# Altium PCB PCB4.PcbDoc
Units mm, origin at the board's own origin, x right, y up, seen from the top; angles counter-clockwise.
Board outline 69 x 82 mm, 2 copper layers (Top Layer, Bottom Layer); 59 components, 64 nets, 251 pads, 48 vias.
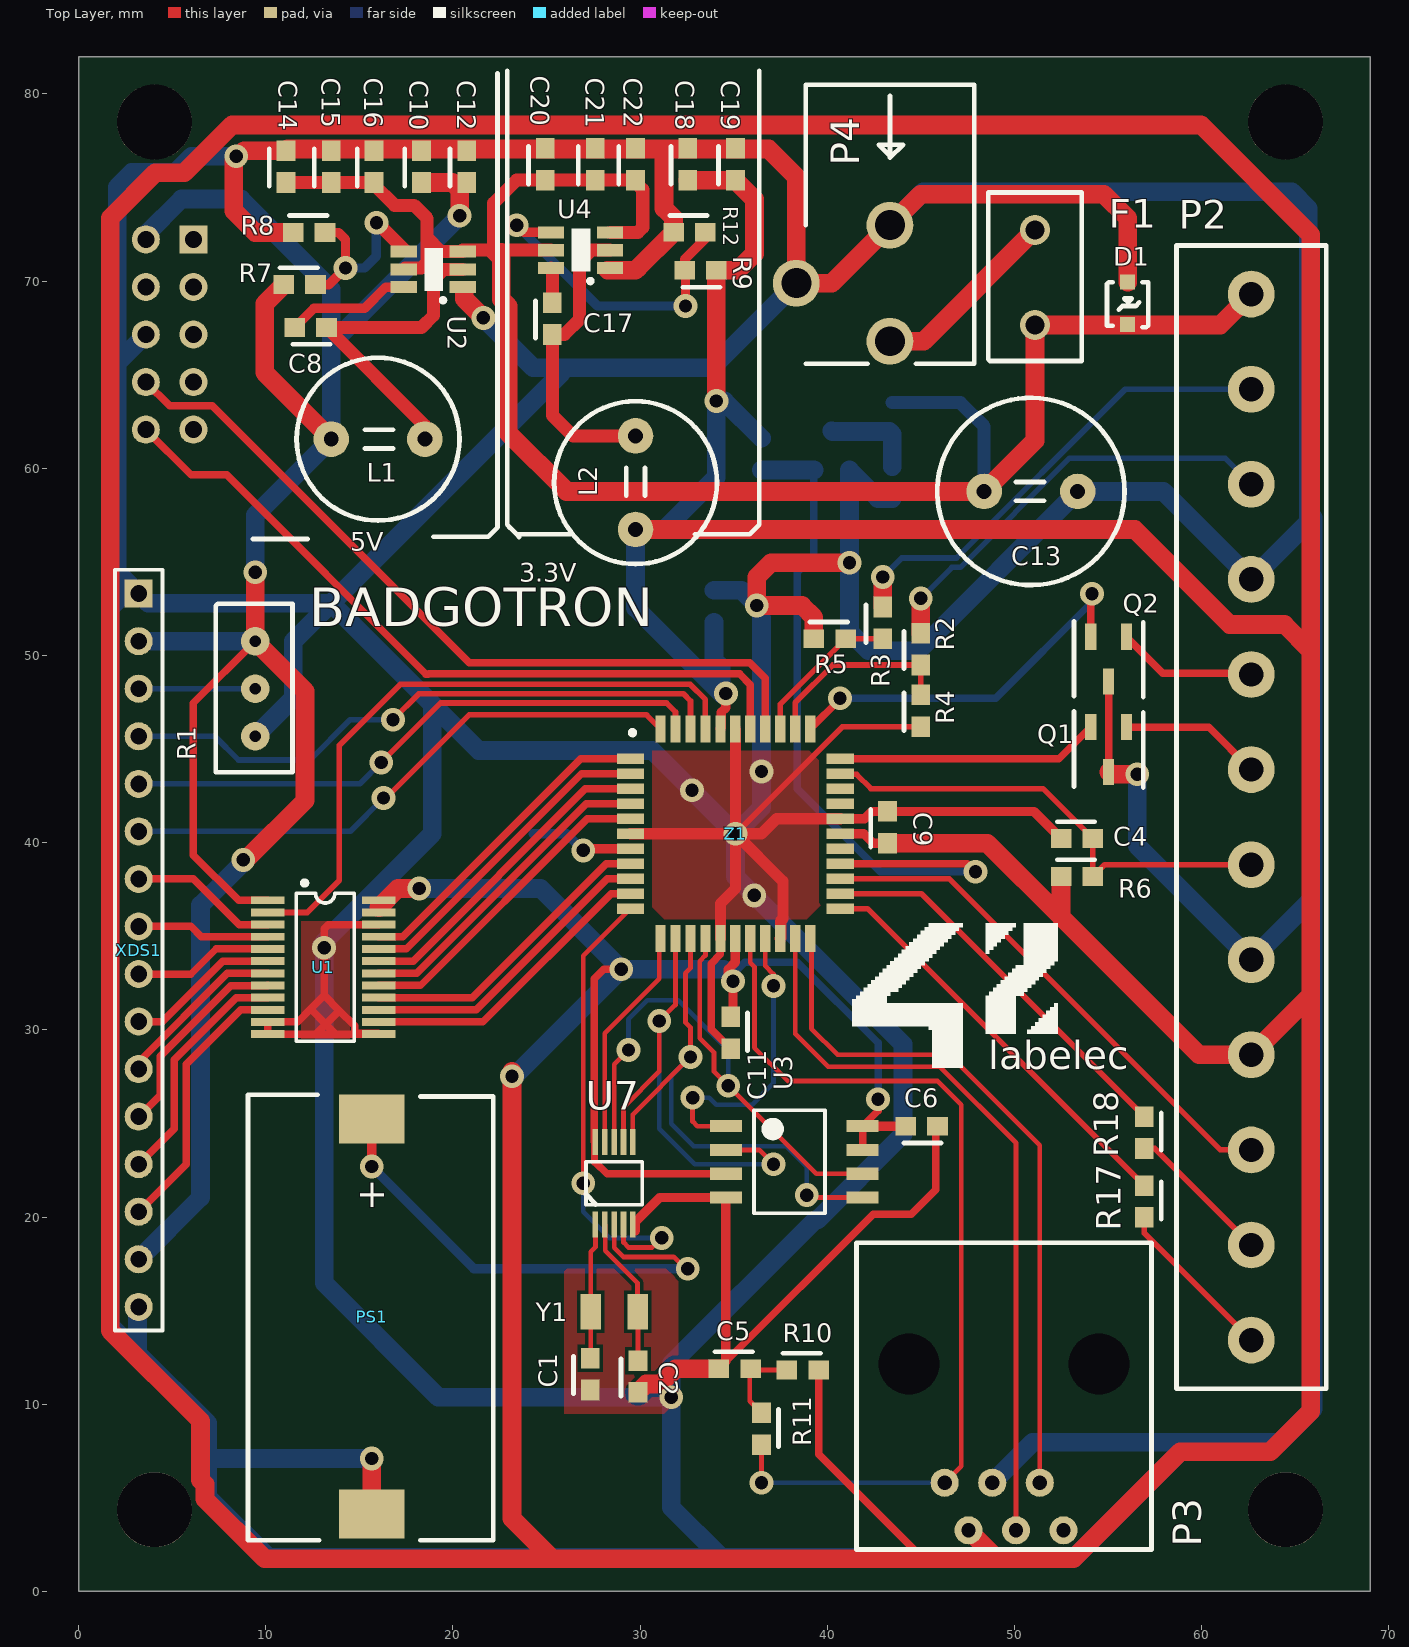
[diagram p0: Top Layer view]
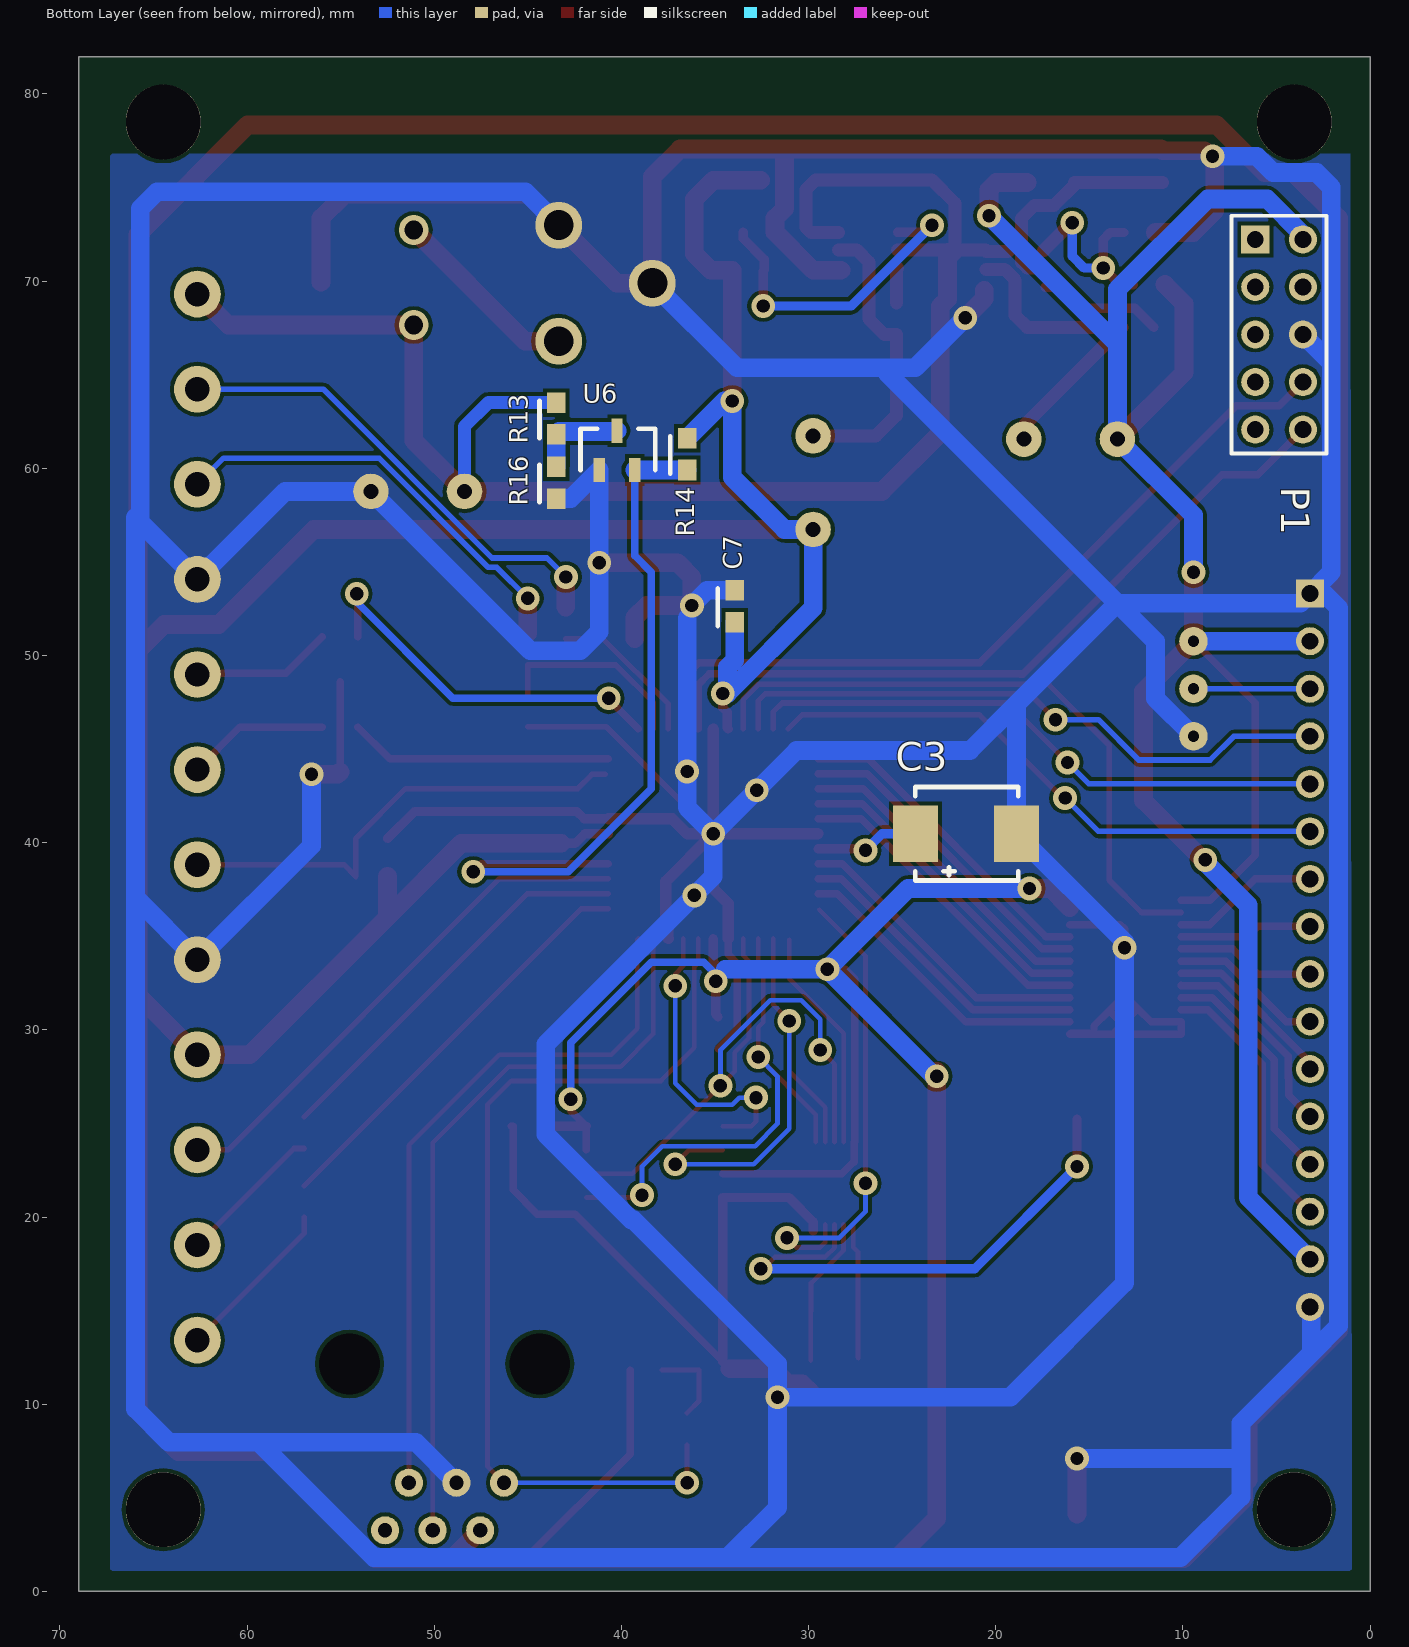
[diagram p1: Bottom Layer view, seen from below]

## Layer stack, top to bottom
Top Solder: solder mask 0.0102, Solder Resist, Dk 3.5
Top Layer: signal copper 0.0356
Dielectric 1: dielectric 0.32, FR-4, Dk 4.8
Bottom Layer: signal copper 0.0356
Bottom Solder: solder mask 0.0102, Solder Resist, Dk 3.5

## Board outline
0,0 69,0 69,82 0,82

## Design rules (kind name [scope] priority, off if disabled: settings)
Clearance [All] p1: gap=0.2
HoleSize [All] p1: absolutevalues=TRUE maxlimit=999 minlimit=0.3 maxpercent=80.000 minpercent=20.000
MinimumSolderMaskSliver [All] p1: minsoldermaskwidth=0.2
PolygonConnect [All] p1: connectstyle=Direct reliefconductorwidth=0.254 reliefentries=4 polygonreliefangle="90 Angle" airgapwidth=0.254
RoutingVias [All] p1: holewidth=0.711 width=1.27 viastyle="Through Hole" minholewidth=0.3 minwidth=0.7 maxholewidth=0.711 maxwidth=1.27
SilkToSilkClearance [All] p1: silktosilkclearance=0.1
SilkToSolderMaskClearance [IsPad] p1: minsilkscreentomaskgap=0.1 clearancetoexposedcopper=TRUE
SolderMaskExpansion [All] p1: expansion=0.102
UnpouredPolygon [All] p1: allowunpoured=FALSE
Width [All] p1: maxlimit=10 minlimit=0.254 preferedwidth=0.254
25 further rules are at their usual default settings.

## Classes and differential pairs
net class S_D[0..7]: S_D0 S_D1 S_D2 S_D3 S_D4 S_D5 S_D6 S_D7
net class RG_LED[0..1]: RG_LED0 RG_LED1
component class VRAIMENTHORSPCB: * B1 D4 DS1 MCL039PURGW P5
component class Power: 1 C8 C10 C12 C13 C14 C15 C16 C17 C18 C19 C20 C21 C22 D1 F1 L1 L2 P4 PS1 R7 R8 R9 R12 R13 R14 R16 U2 U4 U6
component class PIC: C1 C2 C3 C4 C5 C6 C7 C9 C11 P3 R6 R10 R11 U3 U7 Y1 Z1
component class OTHER: P1 P2 Q1 Q2 R2 R3 R4 R5 R17 R18
component class Ecran: R1 U1 XDS1

## Components (designator, comment, footprint, x,y, rotation, side; value= is the part's Value field where it differs from the comment)
C1 "18pF" 0603 27.344,10.761 r90 top
C2 "18pF" 0603 29.884,10.634 r90 top
C3 "10uF" C3 24.296,40.479 r180 bottom
C4 "100nF" 0603 52.49,40.225 r0 top
C5 "0.1uF" 0603 34.202,11.904 r0 top
C6 "22uF" 0603 45.886,24.858 r180 top
C7 "0.1uF" 0603 33.948,51.782 r90 bottom
C8 "0.1uF" 0603 13.247,67.53 r180 top
C9 "0.1uF" 0603 43.219,39.971 r90 top
C10 "22uF" 0603 18.325,75.269 r90 top
C11 "0.1uF" 0603 34.837,30.7 r270 top
C12 "22uF" 0603 20.738,75.269 r90 top
C13 "1000uF" Condo_trav 53.379,58.767 r180 top
C14 "10uF" 0603 11.086,75.269 r90 top
C15 "10uF" 0603 13.499,75.269 r90 top
C16 "0.1uF" 0603 15.785,75.269 r90 top
C17 "0.1uF" 0603 25.312,67.149 r90 top
C18 "22uF" 0603 32.553,75.396 r90 top
C19 "22uF" 0603 35.093,75.396 r90 top
C20 "10uF" 0603 24.933,75.396 r90 top
C21 "10uF" 0603 27.6,75.396 r90 top
C22 "0.1uF" 0603 29.757,75.396 r90 top
D1 "Diode 10TQ035" DiodeZin 56.046,69.943 r270 top
F1 "Fuse 1" FUSIBLE 51.093,72.737 r270 top
L1 "4.7uH" "Bobine Traversante 4.7" 13.501,61.561 r0 top
L2 "3.3uH" "Bobine Traversante 4.7" 29.757,56.735 r90 top
P1 "61304021121" HDR2X5 6.135,72.229 r270 bottom
P2 "31101112" Bornier12 62.65,13.428 r90 top
P3 "90512-001LF" RJ12 44.362,12.158 r0 top
P4 "FC681465P" JackAlim 43.346,72.991 r270 top
PS1 "Support Pile" Pile 15.66,25.239 r270 top
Q1 "MOSFET-N" nouveau_mosfetN 55.03,43.781 r180 top
Q2 "MOSFET-N" nouveau_mosfetN 55.03,48.607 r180 top
R1 "20k" POTARD 9.437,50.766 r270 top
R2 "300k" 0603 44.997,49.496 r90 top
R3 "300k" 0603 42.965,50.893 r90 top
R4 "100k" 0603 44.997,46.194 r90 top
R5 "100k" 0603 39.282,50.893 r0 top
R6 "330" 0603 52.49,38.193 r0 top
R7 "54.9K" 0603 10.961,69.816 r0 top
R8 "10K" 0603 11.467,72.602 r0 top
R9 "33.2K" 0603 34.075,70.578 r180 top
R10 "10K" 0603 37.836,11.826 r0 top
R11 "1Ko" 0603 36.488,9.54 r270 top
R12 "10K" 0603 31.789,72.61 r0 top
R13 "300k" 0603 43.473,61.815 r90 bottom
R14 "330" 0603 36.488,59.91 r90 bottom
R16 "100k" 0603 43.473,58.386 r90 bottom
R17 "60.4" 0603 56.935,21.683 r270 top
R18 "75" 0603 56.935,25.366 r270 top
U1 "74LVX4245MTCX" TRANS 16.041,36.923 r270 top
U2 "TPS562201DDCT" TPS562201DDCT 18.071,69.681 r90 top
U3 "SST25VF016B-50-4C-S2AF-T" FLASH 34.583,24.858 r0 top
U4 "TPS562201DDCT" TPS562201DDCT 25.947,70.705 r90 top
U6 "LM809M3-3.08/NOPB" LM809 41.187,59.91 r90 bottom
U7 "MCP79510-I/MS" rtc 28.614,21.81 r90 top
XDS1 "1-826629-6" HDR1X16 3.214,53.306 r270 top
Y1 "32.768kHz" QUARTZ32KHz 28.614,14.952 r0 top
Z1 "PIC32MX170F256D-I/PT" TQFP-44_L 35.091,40.479 r0 top

## Footprints (in the part's own frame and the unit in brackets; to place one, negate y for a bottom-side part, rotate by r counter-clockwise, add the part's x,y. Pads: shape width x height; smd on the part's side, far side on the other; paste and mask are expansions set on the pad)
0603 [mm] "Chip Inductor, Body 0.6x0.3mm, IPC High Density"
  rect 1.1x1 smd: 1(0,0) 2(1.7,0)
  silkscreen extent -0.2,0.9 1.8,0.9
"Bobine Traversante 4.7" [mm]
  round 1.9 hole 0.8: 1(0,0) 2(5,0)
  silkscreen extent -1.85,-4.35 6.85,4.35
Bornier12 [mm]
  round 2.5 hole 1.3: 1(0,0) 2(5.08,0) 3(10.16,0) 4(15.24,0) 5(20.32,0) 6(25.4,0) 7(30.48,0) 8(35.56,0) 9(40.64,0) 10(45.72,0) 11(50.8,0) 12(55.88,0)
  silkscreen extent -2.6,-4 58.48,4
C3 [mm]
  rect 2.4x3 smd: 1(0,0) 2(5.4,0)
  silkscreen extent 0,-2.5 5.5,2.5
Condo_trav [mm]
  round 1.9 hole 0.8: 1(0,0) 2(5,0)
  silkscreen extent -2.5,-5 7.5,5
DiodeZin [mm]
  rect 0.8x0.8 smd: 1(2.25,0) 3(0,0)
  silkscreen extent 0,-1.1 2.4,1.1
FLASH [mm] "8-Pin Plastic Medium Body Small Outline Package 1.27 mm Pitch, IPC Medium Density"
  rect 1.7x0.65 smd: 1(0,0) 2(0,-1.27) 3(0,-2.54) 4(0,-3.81) 5(7.3,-3.81) 6(7.3,-2.54) 7(7.3,-1.27) 8(7.3,0)
  silkscreen extent 1.5,-4.65 5.3,0.84
FUSIBLE [mm]
  round 1.6 hole 1: 1(0,0) 2(5.08,0)
  silkscreen extent -2,-2.5 7,2.5
HDR1X16 [mm] "Connector; Header; 16 Position"
  rect 1.5x1.5 hole 0.9: 1(0,0)
  round 1.5 hole 0.9: 2(2.54,0) 3(5.08,0) 4(7.62,0) 5(10.16,0) 6(12.7,0) 7(15.24,0) 8(17.78,0) 9(20.32,0) 10(22.86,0) 11(25.4,0) 12(27.94,0) 13(30.48,0) 14(33.02,0) 15(35.56,0) 16(38.1,0)
  silkscreen extent -1.27,-1.27 39.37,1.27
HDR2X5 [mm] "Connector; Header; 5x2 Position"
  rect 1.5x1.5 hole 0.9: 1(0,0)
  round 1.5 hole 0.9: 2(0,2.54) 3(2.54,0) 4(2.54,2.54) 5(5.08,0) 6(5.08,2.54) 7(7.62,0) 8(7.62,2.54) 9(10.16,0) 10(10.16,2.54)
  silkscreen extent -1.27,-1.27 11.43,3.81
JackAlim [mm]
  round 2.5 hole 1.6: 1(6.2,0) 2(3.1,-5) 3(0,0)
  silkscreen extent -7.5,-4.5 7.4,4.5
LM809 [mm]
  rect 1.3x0.6 smd: 1(0,0) 2(0,-1.9) 3(2.1,-0.95)
  silkscreen extent 0,-3 2.2,1
nouveau_mosfetN [mm]
  rect 0.6x1.4 smd: 1(-0.95,-2.4) 2(0.95,-2.4) 3(0,0)
  silkscreen extent -1.85,-3.23 1.85,0.83
Pile [mm]
  rect 2.6x3.5 smd: 1(0,0) 2(21.1,0)
  silkscreen extent -1.3,-6.6 22.5,6.5
POTARD [mil]
  round 60 hole 23.62: 1(0,0) 2(100,0) 3(200,0)
  silkscreen extent -79,-83 276,79
QUARTZ32KHz [mm]
  rect 1.1x1.9 smd: 1(-1.25,0) 2(1.25,0)
RJ12 [mm]
  round 1.524 hole 3.25 unplated: 0(0,0) 0(10.16,0)
  round 1.5 hole 0.762: 1(1.91,-6.35) 2(3.18,-8.89) 3(4.45,-6.35) 4(5.72,-8.89) 5(6.99,-6.35) 6(8.26,-8.89)
  silkscreen extent -2.8,-9.91 12.96,6.47
rtc [mm]
  rect 1.4x0.3 smd: 1(-2.2,1) 2(-2.2,0.5) 3(-2.2,0) 4(-2.2,-0.5) 5(-2.2,-1) 6(2.2,-1) 7(2.2,-0.5) 8(2.2,0) 9(2.2,0.5) 10(2.2,1)
  silkscreen extent -1.15,-1.5 1.15,1.5
TPS562201DDCT [mm]
  rect 0.65x1.4 smd: 1(0,-2.45) 2(0.95,-2.45) 3(1.9,-2.45) 4(1.9,0.7) 5(0.95,0.7) 6(0,0.7)
  silkscreen extent -0.8,-1.5 2.1,-0.4
TQFP-44_L [mm] "44-Pin Thin Quad Flat Pack 0.8 mm Pitch, 1.0/0.1 mm Lead Form, IPC High Density"
  rect 1.45x0.55 smd: 1(-5.6,4) 2(-5.6,3.2) 3(-5.6,2.4) 4(-5.6,1.6) 5(-5.6,0.8) 6(-5.6,0) 7(-5.6,-0.8) 8(-5.6,-1.6) 9(-5.6,-2.4) 10(-5.6,-3.2) 11(-5.6,-4) 23(5.6,-4) 24(5.6,-3.2) 25(5.6,-2.4) 26(5.6,-1.6) 27(5.6,-0.8) 28(5.6,0) 29(5.6,0.8) 30(5.6,1.6) 31(5.6,2.4) 32(5.6,3.2) 33(5.6,4)
  rect 0.55x1.45 smd: 12(-4,-5.6) 13(-3.2,-5.6) 14(-2.4,-5.6) 15(-1.6,-5.6) 16(-0.8,-5.6) 17(0,-5.6) 18(0.8,-5.6) 19(1.6,-5.6) 20(2.4,-5.6) 21(3.2,-5.6) 22(4,-5.6) 34(4,5.6) 35(3.2,5.6) 36(2.4,5.6) 37(1.6,5.6) 38(0.8,5.6) 39(0,5.6) 40(-0.8,5.6) 41(-1.6,5.6) 42(-2.4,5.6) 43(-3.2,5.6) 44(-4,5.6)
  silkscreen extent -5.62,5.28 -5.37,5.52
TRANS [mm] "Shrink Small Outline; 24 Leads; Body Width 4.4 mm; Pitch 0.65 mm"
  rect 0.42x1.78 smd: 1(0,-5.94) 2(0.65,-5.94) 3(1.3,-5.94) 4(1.95,-5.94) 5(2.6,-5.94) 6(3.25,-5.94) 7(3.9,-5.94) 8(4.55,-5.94) 9(5.2,-5.94) 10(5.85,-5.94) 11(6.5,-5.94) 12(7.15,-5.94) 13(7.15,0) 14(6.5,0) 15(5.85,0) 16(5.2,0) 17(4.55,0) 18(3.9,0) 19(3.25,0) 20(2.6,0) 21(1.95,0) 22(1.3,0) 23(0.65,0) 24(0,0)
  silkscreen extent -1.05,-4.42 7.53,-1.31

## Part data
C1 C2 C4 C5 C7 C9 C11 C13: library part Cap, "Capacitor"
C3: library part "Cap Pol1"
C6: library part Cap, "Cout_Reg_3.3v"
C8 C10 C12 C14 C15 C16 C17 C18 C19 C20 C21 C22: library part Cap, "Reg_5v"
D1: "Diode Zenner"
F1: "Fuse"
L1: library part Inductor, "L_Reg_5v"
L2: library part Inductor, "L_Reg_3v"
P1: library part "Header 5X2", "Header, 5-Pin, Dual row"
P2: library part "Header 12", "Header, 12-Pin"
P3: library part "Header 6", "PortRJ12_debug"
P4: library part FC68148S, "Power connector"
PS1: library part SMTU-1225-1-LF
Q1 Q2: "N-Channel MOSFET"
R1: library part RPot, "Potentiometer"
R2 R3 R4 R5 R6 R7 R8 R9 R10 R11 R12 R13 R14 R16 R17 R18: library part Res2, "Resistor"
U1: "Bus Transceiver"
U2 U4: "Reg 12V-5V"
U3: library part Memoire, "FLASH"
U6: "Voltage Monitor"
U7: library part MCP79510, "RTC"
XDS1: library part "Header 16", "Header, 16-Pin"
Y1: library part XTAL, "Crystal Oscillator"
Z1: library part PIC32_1, "PIC"

## Free pads (board coordinates)
  round 4 hole 4: 3(4.055,4.363) 3(4.055,78.5) 3(64.476,4.363) 3(64.476,78.5)

## Via types
v1: diameter 1.27, hole 0.711, Top Layer to Bottom Layer, 48 vias

## Nets (pads, with @x,y where several pads share a name; then routed paths per layer and width w, separated by ;. In a path a pad name is that pad's centre, name@x,y a point inside that pad or via, vN(x,y) a via of type N, cw(c..) or ccw(c..) an arc to the next point about the centre after c; other vN are vias at no path point)
5VDC: C10.1 C12.1 L1.1 P1.2 R1.1 R7.1 U1.1 XDS1.2 XDS1.15 | length 118.7
  Top Layer w0.4: R1.1 6.135,47.464 6.135,39.336 8.548,36.923 U1.1
  Top Layer w1: v1(8.802,39.082) 8.929,39.082 12.104,42.257 12.104,48.099 R1.1 v1(9.437,54.449) ; R7.1 9.945,68.8 9.945,65.117 L1.1 ; C10.1 19.98,75.269 20.359,74.89 v1(20.359,73.499)
  Bottom Layer w1: XDS1.15 6.516,21.048 6.516,36.669 8.802,38.955 v1(8.802,39.082) ; XDS1.2 R1.1 ; P1.2 3.595,72.483 5.5,74.388 8.675,74.388 13.501,69.562 13.501,66.641 ; v1(9.437,54.449) 9.437,57.497 L1.1 13.501,66.641 ; v1(20.359,73.499) 13.501,66.641
12VDC: C13.2 C14.1 C15.1 C16.1 C20.1 C21.1 C22.1 D1.1 F1.2 P2.12 R13.2 U2.3 U2.5 U4.3 U4.5 | length 102.3
  Top Layer w0.7: C14.1 C15.1 C16.1 15.785,75.152 16.888,74.049 17.929,74.049 18.623,73.355 18.623,72.314 ; U2.5@17.446,70.706 18.325,70.706 18.621,71.002 18.621,72.312 18.623,72.314 ; U2.3 19.356,71.581 18.623,72.314 ; U2.3@20.521,71.656 22.178,71.656 22.178,74.175 23.399,75.396 C20.1 C21.1 29.638,75.396 30.14,74.894 30.14,72.866 29.879,72.605 U4.3 ; 22.179,71.655 U4.5
  Top Layer w1: 22.178,71.656 22.179,71.655 22.579,71.255 ; 22.579,71.528 22.579,71.255 ; P2.12 60.999,67.657 F1.2 51.093,61.481 C13.2 26.074,58.767 22.964,61.877 22.964,68.656 22.579,69.041 22.579,71.255
  Bottom Layer w0.7: R13.2 47.107,63.515 48.379,62.243 C13.2
CMD_SERVO: P2.3 Z1.25 | length 28
  Top Layer w0.3: Z1.25 46.508,38.079 60.999,23.588 P2.3
CR_DATA0_3V: R2.1 R4.2 Z1.35 | length 10.5
  Top Layer w0.3: Z1.35 38.291,47.489 40.298,49.496 R2.1 R4.2
CR_DATA0_12V: P2.10 R2.2 | length 23.2
  Top Layer w1: R2.2 v1(44.997,53.052)
  Bottom Layer w0.3: v1(44.997,53.052) 46.656,54.711 47.109,54.711 52.943,60.545 61.253,60.545 P2.10
CR_DATA1_3V: R3.1 R5.2 Z1.36 | length 8.2
  Top Layer w0.3: Z1.36 37.491,47.402 R5.2 R3.1
CR_DATA1_12V: P2.11 R3.2 | length 25.4
  Top Layer w1: R3.2 v1(42.965,54.195)
  Bottom Layer w0.3: v1(42.965,54.195) 43.981,55.211 46.902,55.211 55.919,64.228 P2.11
CR_LED_G: Q2.2 Z1.34 | length 20.4
  Top Layer w0.4: Z1.34 40.679,47.667 v1(40.679,47.718) ; v1@54.014,53.052 54.08,52.986 54.08,52.798 Q2.2
  Bottom Layer w0.4: v1(40.679,47.718) 49,47.718 54.141,52.859 v1(54.141,53.306)
CR_LED_G_CTRL: P2.8 Q2.1 | length 7.5
  Top Layer w0.4: Q2.1 57.933,49.054 P2.8@62.584,49.054
  Top Layer w1: P2.8@62.584,49.054 P2.8
CR_LED_R: Q1.2 Z1.33 | length 14.1
  Top Layer w0.4: Z1.33 52.378,44.479 Q1.2
CR_LED_R_CTRL: P2.7 Q1.1 | length 7.6
  Top Layer w0.4: Q1.1 60.377,46.181 P2.7
FLSH_CE: U3.1 Z1.19 | length 16
  Top Layer w0.254: v1(32.805,26.382) 32.805,25.112 33.059,24.858 U3.1 ; Z1.19 36.691,33.418 37.123,32.986 v1(37.123,32.351)
  Bottom Layer w0.254: v1(32.805,26.382) 33.694,26.382 34.075,26.001 35.98,26.001 37.123,27.144 v1(37.123,32.351)
GND: C1.1 C2.1 C3.2 C4.1 C5.1 C6.1 C7.2 C9.2 C10.2 C11.2 C12.2 C13.1 C14.2 C15.2 C16.2 C18.2 C19.2 C20.2 C21.2 C22.2 D1.3 P1.6 P2.5 P2.9 P3.3 P4.2 P4.3 PS1.2 Q1.3 Q2.3 R1.3 R4.1 R5.1 R8.1 R12.1 R16.1 U1.11 U1.12 U1.13 U1.22 U2.1 U3.4 U4.1 U6.1 U7.5 XDS1.1 XDS1.16 Z1.6 Z1.16 Z1.20 Z1.29 Z1.39 | length 740
  Top Layer w0.3: v1(35.091,40.479) 40.806,46.194 R4.1
  Top Layer w0.4: U1.22 13.344,35.623 13.12,35.399 v1(13.12,34.383) 13.12,31.843 ; C5.1 34.583,12.285 42.457,20.159 44.489,20.159 45.787,21.457 45.787,24.858 C6.1 ; Z1.16 34.291,34.031 33.802,33.542 33.802,30.035 C11.2 ; Q1.3 Q2.3 ; 12.41,31.133 13.12,31.843 ; 12.41,31.133 11.7,30.423 U1.11 U1.12 12.681,29.773 ; 12.41,31.133 12.41,31.118 13.218,30.31 ; 12.681,29.773 13.218,30.31 ; 12.681,29.773 13.755,29.773 ; 13.12,31.843 13.936,31.028 ; 13.218,30.31 13.936,31.028 ; 13.218,30.31 13.755,29.773 ; 13.755,29.773 U1.13 16.001,29.813 14.751,29.813 14.751,30.212 13.936,31.028
  Top Layer w0.5: U7.5@29.757,19.27 29.757,19.753 31.052,21.048 U3.4 C5.1@34.583,12.285 ; Z1.29 41.987,41.279 42.379,41.671 C9.2 51.044,41.671 C4.1
  Top Layer w0.6: Z1.6 v1(35.091,40.479) ; Z1.16 34.291,36.758 35.091,37.558 v1(35.091,40.479) ; Z1.39 v1(35.091,40.479) ; Z1.20 37.516,34.904 37.516,35.811 37.631,35.926 37.631,37.939 v1(35.091,40.479) ; Z1.29 37.288,41.279 36.488,40.479 v1(35.091,40.479)
  Top Layer w1: v1@8.294,76.42 8.294,73.753 9.445,72.602 R8.1 ; v1@8.843,76.969 C14.2 ; C14.2@11.172,77.055 31.281,77.055 ; PS1.2 v1(15.66,7.1) ; U2.1@20.613,69.514 20.613,69.054 v1(21.629,68.038) ; U4.1@28.27,70.578 29.757,70.578 ; C2.1 30.334,11.084 31.084,11.084 31.904,11.904 C5.1 ; 29.884,70.705 R12.1 31.789,73.372 31.281,73.88 31.281,77.055 ; R5.1 39.282,52.036 38.647,52.671 v1(36.234,52.671) 36.234,54.195 36.996,54.957 v1(41.187,54.957) ; Q1.3 55.157,43.654 v1(56.554,43.654) ; D1.3 56.046,73.372 54.776,74.642 44.997,74.642 P4.3 40.246,69.891 P4.2 38.346,75.578 36.869,77.055 31.281,77.055
  Bottom Layer w0.3: U6.1 U6.1@41.187,60.164
  Bottom Layer w1: XDS1.16 3.151,15.143 3.151,12.73 ; P1.6 2.071,65.625 ; v1(8.421,76.674) 6.047,76.674 5.173,75.8 2.848,75.8 2.071,75.023 2.071,65.625 ; R1.3 11.469,47.718 11.469,50.766 13.501,52.798 ; v1(15.66,7.1) 6.983,7.1 6.897,7.015 ; v1(21.629,68.038) 24.296,65.371 33.826,65.371 P4.2 ; 25.82,65.117 13.501,52.798 ; C7.2 35.423,53.482 v1(36.234,52.671) ; 36.488,52.007 36.488,41.876 v1(35.091,40.479) ; P4.3 45.124,74.769 64.809,74.769 65.698,73.88 65.698,57.116 ; R16.1 42.711,58.386 U6.1 v1(41.187,54.957) 41.187,51.274 42.203,50.258 44.87,50.258 C13.1 57.951,58.767 P2.9 65.698,57.116 ; P3.3 50.971,7.967 59.372,7.967 ; v1(56.554,43.654) 56.554,39.844 P2.5 65.952,37.05 ; 2.071,65.625 2.071,54.449 XDS1.1 ; 3.151,12.73 6.897,8.983 6.897,7.015 ; 3.151,12.73 1.69,14.19 1.69,52.544 2.452,53.306 XDS1.1 ; XDS1.1 3.722,52.798 13.501,52.798 ; 6.897,7.015 6.897,5.046 10.125,1.818 34.329,1.818 ; 13.501,52.798 18.896,47.403 ; 18.896,47.403 21.375,44.924 30.646,44.924 v1(35.091,40.479) ; 18.896,47.403 C3.2 13.12,34.703 v1(13.12,34.383) 13.12,16.476 19.216,10.38 v1(31.662,10.38) ; v1(31.662,10.38) 31.662,12.158 39.344,19.84 39.454,19.84 44.046,24.432 44.046,29.241 35.091,38.196 v1(35.091,40.479) ; v1(31.662,10.38) 31.662,4.485 34.329,1.818 ; 34.329,1.818 53.223,1.818 59.372,7.967 ; 59.372,7.967 64.174,7.967 65.952,9.745 65.952,37.05 ; 65.698,57.116 65.952,57.37 65.952,37.05
  other v1: 36.1,37.187 32.77,42.8 36.488,43.8
MCLR: P3.1 R11.2 Z1.18 | length 50.6
  Top Layer w0.254: Z1.18 35.891,33.583 36.107,33.367 36.107,29.049 37.885,27.271 45.886,27.271 47.156,26.001 47.156,6.692 P3.1 ; v1(36.488,5.808) R11.2
  Bottom Layer w0.254: v1(36.488,5.808) P3.1
NetC3_1: C3.1 Z1.7 | length 5.5
  Top Layer w0.5: v1@27.052,39.679 Z1.7
  Bottom Layer w0.5: C3.1 26.074,40.479 v1(26.963,39.59)
NetC5_2: C5.2 R10.1 R11.1 | length 4.5
  Top Layer w0.254: R11.1 35.853,10.175 35.853,11.826 R10.1
NetC8_1: C8.1 L1.2 U2.2 | length 17.8
  Top Layer w0.5: L1.2 L1.2@18.501,62.276
  Top Layer w0.7: L1.2@18.501,62.276 C8.1 18.327,67.53 18.962,68.165 18.962,70.07 19.523,70.631 U2.2
NetC8_2: C8.2 U2.6 | length 6.7
  Top Layer w0.5: C8.2 12.563,68.546 15.279,68.546 16.414,69.681 U2.6
NetC17_1: C17.1 L2.2 U4.2 | length 16
  Top Layer w0.7: U4.2 27.405,71.655 26.77,71.02 26.77,67.972 25.947,67.149 C17.1 25.312,62.831 26.408,61.735 L2.2
NetC17_2: C17.2 U4.6 | length 1.9
  Top Layer w0.7: U4.6 25.312,70.64 C17.2
NetF1_1: F1.1 P4.1 | length 10.2
  Top Layer w1: P4.1 45.147,66.791 F1.1
NetP2_1: P2.1 R17.2 | length 8.9
  Top Layer w0.3: R17.2 56.935,19.143 P2.1
NetP2_2: P2.2 R18.2 | length 7.9
  Top Layer w0.3: R18.2 57.492,23.666 P2.2
NetR7_2: R7.2 R8.2 U2.4 | length 10.6
  Top Layer w0.5: R7.2 13.374,69.816 v1(14.263,70.705) 14.263,72.229 13.89,72.602 R8.2
  Top Layer w0.7: v1(15.914,73.118) 15.968,73.118 U2.4@17.438,71.648
  Bottom Layer w0.5: v1(14.263,70.705) 15.279,70.705 15.914,71.34 v1(15.914,73.118)
NetR9_2: R9.2 R12.2 U4.4 | length 17.2
  Top Layer w0.5: v1(23.407,72.991) 23.793,72.605 U4.4 ; v1(32.424,68.673) 32.424,70.529 R9.2 32.375,71.164 33.489,72.278 R12.2
  Bottom Layer w0.5: v1(23.407,72.991) 27.725,68.673 v1(32.424,68.673)
PGEC1: P3.5 Z1.22 | length 37.6
  Top Layer w0.254: Z1.22 39.155,34.815 39.155,30.065 40.552,28.668 46.521,28.668 51.352,23.837 P3.5
PGED1: P3.4 Z1.21 | length 40
  Top Layer w0.254: Z1.21 38.291,29.786 40.044,28.033 46.013,28.033 50.082,23.964 P3.4
PIC_RASPI_RXD: P1.8 Z1.37 | length 42.4
  Top Layer w0.4: P1.8 4.865,63.339 7.151,63.339 20.867,49.623 35.853,49.623 36.691,48.785 Z1.37
PIC_RASPI_TXD: P1.10 Z1.38 | length 40.3
  Top Layer w0.4: P1.10 6.008,59.656 7.913,59.656 18.562,49.007 18.694,49.007 18.701,49.014 35.319,49.014 35.891,48.442 Z1.38
POT_CONTRASTE: R1.2 XDS1.3 | length 6.2
  Bottom Layer w0.3: XDS1.3 R1.2
POWEROK: R14.1 U6.2 Z1.26 | length 39
  Top Layer w0.4: Z1.26 47.486,38.879 v1(47.918,38.447)
  Bottom Layer w0.4: U6.2 39.287,55.343 38.393,54.449 38.393,42.892 42.838,38.447 v1(47.918,38.447)
  Bottom Layer w1: R14.1 U6.2
RG_LED0: R17.1 Z1.23 | length 22.4
  Top Layer w0.3: Z1.23 42.139,36.479 R17.1
RG_LED1: R18.1 Z1.24 | length 21.2
  Top Layer w0.3: Z1.24 45.022,37.279 R18.1
RTC_CS: U7.4 Z1.11 | length 25.2
  Top Layer w0.254: v1(26.963,21.81) 26.963,33.951 Z1.11@29.427,36.415 ; U7.4 29.114,18.643 29.376,18.381 30.646,18.381 v1(31.154,18.889)
  Bottom Layer w0.254: v1(26.963,21.81) 26.963,20.286 28.36,18.889 v1(31.154,18.889)
RTC_MFP: U7.9 Z1.12 | length 12
  Top Layer w0.254: U7.9 28.114,29.819 31.027,32.732 Z1.12@31.027,34.815
S_D0: U1.21 Z1.1 | length 17.4
  Top Layer w0.4: U1.21 17.316,34.973 26.822,44.479 Z1.1
S_D1: U1.20 Z1.2 | length 17.3
  Top Layer w0.4: U1.20 17.515,34.323 26.871,43.679 Z1.2
S_D2: U1.19 Z1.3 | length 17.3
  Top Layer w0.4: U1.19 17.871,33.673 27.077,42.879 Z1.3
S_D3: U1.18 Z1.4 | length 17.2
  Top Layer w0.4: U1.18 18.07,33.023 27.126,42.079 Z1.4
S_D4: U1.17 Z1.5 | length 17.1
  Top Layer w0.4: U1.17 18.268,32.373 27.174,41.279 Z1.5
S_D5: U1.16 Z1.8 | length 16.4
  Top Layer w0.4: U1.16 21.041,31.723 28.197,38.879 Z1.8
S_D6: U1.15 Z1.9 | length 16.4
  Top Layer w0.4: U1.15 21.24,31.073 28.246,38.079 Z1.9
S_D7: U1.14 Z1.10 | length 16.3
  Top Layer w0.4: U1.14 21.606,30.423 28.462,37.279 Z1.10
S_E: XDS1.6 Z1.44 | length 30.8
  Top Layer w0.3: v1(16.295,42.384) 16.422,42.384 20.867,46.829 30.341,46.829 Z1.44
  Bottom Layer w0.3: XDS1.6 14.517,40.606 v1(16.295,42.384)
S_RS: XDS1.4 Z1.42 | length 33.1
  Top Layer w0.3: v1(16.803,46.575) 18.185,47.957 19.129,47.957 19.136,47.964 32.305,47.964 32.691,47.578 Z1.42
  Bottom Layer w0.3: XDS1.4 7.278,45.686 8.548,44.416 12.358,44.416 14.517,46.575 v1(16.803,46.575)
S_RW: XDS1.5 Z1.43 | length 31.6
  Top Layer w0.3: v1(16.168,44.289) 19.343,47.464 31.408,47.464 31.891,46.981 Z1.43
  Bottom Layer w0.3: XDS1.5 15.025,43.146 v1(16.168,44.289)
SPI_SCK: U3.6 U7.8 Z1.15 | length 33.4
  Top Layer w0.254: U7.8 28.614,28.16 v1(29.376,28.922) ; Z1.15 33.491,33.976 33.186,33.671 33.186,29.557 33.948,28.795 33.948,27.779 v1(34.71,27.017) 39.409,22.318 U3.6
  Bottom Layer w0.254: v1(29.376,28.922) 29.376,30.573 30.392,31.589 32.043,31.589 34.71,28.922 v1(34.71,27.017)
SPI_SI: U3.2 U7.7 Z1.13 | length 27.5
  Top Layer w0.254: U7.7 29.114,25.866 31.027,27.779 v1(31.027,30.471) 31.891,31.335 Z1.13 ; U3.2 36.361,23.588 v1(37.123,22.826)
  Bottom Layer w0.254: v1(31.027,30.471) 31.027,24.731 32.932,22.826 v1(37.123,22.826)
SPI_SO: U3.5 U7.6 Z1.14 | length 29.1
  Top Layer w0.254: U7.6 29.614,25.477 v1(32.691,28.554) 32.691,30.135 32.424,30.402 32.424,33.031 32.691,33.298 Z1.14 ; v1(38.901,21.175) 39.028,21.048 U3.5
  Bottom Layer w0.254: v1(32.691,28.554) 31.662,27.525 31.662,24.985 32.859,23.788 37.812,23.788 38.901,22.699 v1(38.901,21.175)
STATUS_BTN: C4.2 P2.6 R6.2 Z1.32 | length 25.5
  Top Layer w0.3: Z1.32@40.873,43.654 41.568,43.654 42.33,42.892 51.523,42.892 C4.2 R6.2 54.825,38.828 P2.6
TS_D0: U1.3 XDS1.7 | length 7.9
  Top Layer w0.4: XDS1.7 6.135,38.066 8.578,35.623 U1.3
TS_D1: U1.4 XDS1.8 | length 7.1
  Top Layer w0.4: XDS1.8 6.008,35.526 6.561,34.973 U1.4
TS_D2: U1.5 XDS1.9 | length 7.4
  Top Layer w0.4: XDS1.9 6.008,32.986 7.345,34.323 U1.5
TS_D3: U1.6 XDS1.10 | length 8.2
  Top Layer w0.4: XDS1.10 4.484,30.446 7.711,33.673 U1.6
TS_D4: U1.7 XDS1.11 | length 9.2
  Top Layer w0.4: XDS1.11 3.214,28.287 7.95,33.023 U1.7
TS_D5: U1.8 XDS1.12 | length 11
  Top Layer w0.4: XDS1.12 4.357,26.509 4.357,27.416 4.364,27.423 4.364,28.588 8.127,32.351 10.079,32.351 U1.8
TS_D6: U1.9 XDS1.13 | length 12.7
  Top Layer w0.4: XDS1.13 5.119,24.731 5.119,28.414 8.428,31.723 U1.9
TS_D7: U1.10 XDS1.14 | length 14.5
  Top Layer w0.4: XDS1.14 5.754,22.826 5.754,28.16 8.667,31.073 U1.10
TS_TR: U1.2 Z1.41 | length 34.6
  Top Layer w0.3: U1.2 12.216,36.273 13.936,37.993 13.936,45.209 17.184,48.457 18.922,48.457 18.929,48.464 32.671,48.464 33.491,47.644 Z1.41
U6_VCC: R13.1 R16.2 U6.3 | length 5
  Bottom Layer w1: U6.3 40.274,61.973 43.315,61.973 R13.1 R16.2
VBAT: PS1.1 U7.3 | length 27.3
  Top Layer w0.254: U7.3 28.614,18.368 29.109,17.873 31.789,17.873 v1@32.488,17.175
  Top Layer w0.5: v1(15.66,22.699) PS1.1
  Bottom Layer w0.5: v1(15.66,22.699) 21.121,17.238 v1(32.551,17.238)
VOUT3.3: C6.2 C7.1 C9.1 C11.1 C18.1 C19.1 L2.1 P2.4 P3.2 R6.1 R9.1 R10.2 R14.2 U1.23 U1.24 U3.3 U3.7 U3.8 U7.10 Z1.17 Z1.28 Z1.40 | length 495.7
  Top Layer w0.4: 27.564,22.937 27.564,24.01 27.54,24.034 27.54,32.732 28.048,33.24 v1(28.995,33.24) ; 27.614,22.937 28.233,22.318 U3.3 ; R10.2 39.536,7.332 45.124,1.744 ; U3.7 U3.8 42.711,25.686 v1(42.711,26.3)
  Top Layer w0.5: Z1.40 34.341,46.129 34.341,46.965 34.583,47.207 v1(34.583,47.972) ; v1@34.71,32.859 34.71,33.24 35.091,33.621 Z1.17 ; C11.1 34.964,30.827 v1(34.964,32.605) ; Z1.28 41.949,40.479 42.457,39.971 C9.1 ; U3.8 C6.2 ; P2.4@62.015,28.668 P2.4
  Top Layer w1: 16.041,36.533 17.066,37.558 v1(18.2,37.558) ; v1@23.153,27.779 v1(23.153,27.525) 23.153,3.903 25.312,1.744 ; L2.1 56.427,56.735 61.507,51.655 64.428,51.655 65.825,50.258 ; C18.1 C19.1 36.107,74.382 36.107,71.467 35.218,70.578 R9.1 v1(34.075,63.593) ; C9.1 48.553,39.971 52.49,36.034 ; P3.2 49.066,1.744 ; 49.136,1.744 49.066,1.744 ; R6.1 52.49,36.034 ; P2.4@62.015,28.668 59.856,28.668 52.49,36.034 ; P2.4 65.825,31.843 ; 25.312,1.744 45.124,1.744 49.066,1.744 ; 25.312,1.744 9.945,1.744 6.755,4.934 6.755,5.72 6.516,5.959 6.516,9.11 1.69,13.936 1.69,73.372 4.103,75.785 5.644,75.785 8.205,78.346 59.962,78.346 65.825,72.483 65.825,50.258 ; 49.066,1.744 53.149,1.744 58.864,7.459 63.666,7.459 65.825,9.618 65.825,31.843 ; 65.825,31.843 65.825,50.258
  Bottom Layer w0.4: 34.456,33.24 34.837,32.859 35.599,33.621 38.393,33.621 42.711,29.303 v1(42.711,26.3)
  Bottom Layer w1: v1(18.2,37.558) 24.677,37.558 v1(28.995,33.24) ; v1(23.153,27.525) 23.28,27.525 v1(28.995,33.24) ; C7.1 33.948,49.75 34.329,49.369 34.329,47.972 29.757,52.544 L2.1 31.281,56.735 34.075,59.529 v1(34.075,63.593) 34.505,63.593 R14.2 ; 34.456,33.24 v1(28.995,33.24)
X1: C1.2 U7.1 Y1.1 | length 7.3
  Top Layer w0.254: C1.2 27.364,12.481 Y1.1 27.364,18.147 27.614,18.397 U7.1
X2: C2.2 U7.2 Y1.2 | length 8
  Top Layer w0.254: U7.2 28.137,19.587 28.137,18.203 29.864,16.476 Y1.2 29.884,14.932 C2.2
pads on no net: P1.1 P1.3 P1.4 P1.5 P1.7 P1.9 P3.0 P3.6 Z1.27 Z1.30 Z1.31

## Polygon pours and split planes (outlines as drawn)
GND on Top Layer "GND PLAN" (solid, pour order 7): 30.646,44.924 30.646,36.542 31.281,35.907 38.774,35.907 38.901,35.907 39.663,36.669 39.536,36.796 39.536,44.289 39.536,44.416 39.028,44.924
GND on Top Layer "GND PLAN" (solid, pour order 5): 26.074,17.238 25.947,17.111 25.947,9.491 31.281,9.491 31.662,9.872 32.043,10.253 32.043,16.476 32.043,16.603 31.408,17.238
GND on Top Layer "GND PLAN" (solid, pour order 8): 11.9,35.8 14.415,35.8 14.426,35.811 14.5,35.737 14.5,29.52 11.9,29.52
GND on Bottom Layer "GND PLAN" (solid, pour order 6): 1.061,76.8 67.3,76.8 67.3,1.1 0.99,1.1

## Silkscreen, mask and mechanical layers (free items; w line width, h text height)
Top Overlay:
  drawing of 15 lines, arcs and shapes, not listed
  text "5V" at 14.517,55.592 h1
  text "3.3V" at 23.534,53.941 h1
  text "BADGOTRON" at 12.333,50.9 h3.5
  text "labelec" at 48.6,27.906 h1.52
Board Outline:
  the board outline again, w0.254
Drill Drawing:
  circle w0.025: c81.906,46.165 r0.381
  circle w0.025: c81.906,46.165 r0.635
  circle w0.025: c81.906,27.115 r0.635
  lines w0.025: 81.271,30.29 81.906,30.608 82.541,30.29 82.223,30.925 82.541,31.56 81.906,31.243 81.271,31.56 81.588,30.925 81.271,30.29 ; 81.271,34.1 81.271,34.418 81.588,34.735 81.271,35.053 81.271,35.37 81.588,35.37 81.906,35.053 82.223,35.37 82.541,35.37 82.541,35.053 82.223,34.735 82.541,34.418 82.541,34.1 82.223,34.1 81.906,34.418 81.588,34.1 81.271,34.1 ; 81.271,38.228 81.588,38.228 81.906,37.91 82.223,38.228 82.541,38.228 82.223,38.545 82.541,38.863 82.223,38.863 81.906,39.18 81.588,38.863 81.271,38.863 81.588,38.545 81.271,38.228 ; 81.271,42.99 82.541,42.99 81.906,41.72 81.271,42.99 ; 81.271,49.975 81.906,49.34 82.541,49.975 81.906,50.61 81.271,49.975 ; 81.271,53.15 82.541,53.15 82.541,54.42 81.271,54.42 81.271,53.15 ; 81.271,56.96 82.541,56.96 82.541,58.23 81.271,58.23 81.271,56.96 ; 81.271,61.088 81.588,61.088 81.588,60.77 82.223,60.77 82.223,61.088 82.541,61.088 82.541,61.723 82.223,61.723 82.223,62.04 81.588,62.04 81.588,61.723 81.271,61.723 81.271,61.088 ; 81.525,57.214 82.287,57.214 82.287,57.976 81.525,57.976 81.525,57.214
  lines w0.381: 79.54,25.337 178.066,25.337 ; 79.54,63.437 178.066,63.437 ; 93.533,21.527 93.533,67.247 ; 111.257,21.527 111.257,67.247 ; 145.435,21.527 145.435,67.247 ; 158.285,21.527 158.285,67.247 ; 79.54,21.527 178.066,21.527 178.066,67.247 79.54,67.247 79.54,21.527
  text "Symbol" at 81.826,64.58 h1.83
  text "Hit Count" at 94.676,64.58 h1.83
  text "Finished Hole Size" at 112.4,64.58 h1.83
  text "Plated" at 146.578,64.58 h1.83
  text "Hole Type" at 159.428,64.58 h1.83
  text "2" at 94.676,60.77 h1.52
  text "1.000mm (39.37mil)" at 112.4,60.77 h1.52
  text "PTH" at 146.578,60.77 h1.52
  text "Round" at 159.428,60.77 h1.52
  text "2" at 94.676,56.96 h1.52
  text "3.250mm (127.95mil)" at 112.4,56.96 h1.52
  text "NPTH" at 146.578,56.96 h1.52
  text "Round" at 159.428,56.96 h1.52
  text "3" at 94.676,53.15 h1.52
  text "0.600mm (23.62mil)" at 112.4,53.15 h1.52
  text "PTH" at 146.578,53.15 h1.52
  text "Round" at 159.428,53.15 h1.52
  text "3" at 94.676,49.34 h1.52
  text "1.600mm (62.99mil)" at 112.4,49.34 h1.52
  text "PTH" at 146.578,49.34 h1.52
  text "Round" at 159.428,49.34 h1.52
  text "4" at 94.676,45.53 h1.52
  text "4.000mm (157.48mil)" at 112.4,45.53 h1.52
  text "PTH" at 146.578,45.53 h1.52
  text "Round" at 159.428,45.53 h1.52
  text "6" at 94.676,41.72 h1.52
  text "0.762mm (30.00mil)" at 112.4,41.72 h1.52
  text "PTH" at 146.578,41.72 h1.52
  text "Round" at 159.428,41.72 h1.52
  text "6" at 94.676,37.91 h1.52
  text "0.800mm (31.50mil)" at 112.4,37.91 h1.52
  text "PTH" at 146.578,37.91 h1.52
  text "Round" at 159.428,37.91 h1.52
  text "12" at 94.676,34.1 h1.52
  text "1.300mm (51.18mil)" at 112.4,34.1 h1.52
  text "PTH" at 146.578,34.1 h1.52
  text "Round" at 159.428,34.1 h1.52
  text "26" at 94.676,30.29 h1.52
  text "0.900mm (35.43mil)" at 112.4,30.29 h1.52
  text "PTH" at 146.578,30.29 h1.52
  text "Round" at 159.428,30.29 h1.52
  text "48" at 94.676,26.48 h1.52
  text "0.711mm (28.00mil)" at 112.4,26.48 h1.52
  text "PTH" at 146.578,26.48 h1.52
  text "Round" at 159.428,26.48 h1.52
  text "112 Total" at 94.676,22.67 h1.52

## Dimensions
0,82 to 0,0 on Dimensions
0,82 to 69,82 on Dimensions

## Text inside footprints (layer, text, board x,y; h text height)
PS1: Top Overlay "+" at 15.06,22.039 h1.52 r270